# Altium PCB SPT3G_LCBoardRev5.PcbDoc (part 1 of 4)
Units mil, origin at the board's own origin, x right, y up, seen from the top; angles counter-clockwise.
Board outline 7275.33 x 1969 mil, 6 copper layers (Top Layer, Signal Layer 1, Internal Plane 1, Internal Plane 2, Signal Layer 2, Bottom Layer), stack 61.6 mil thick; 26 components, 141 nets, 668 pads, 146 vias.
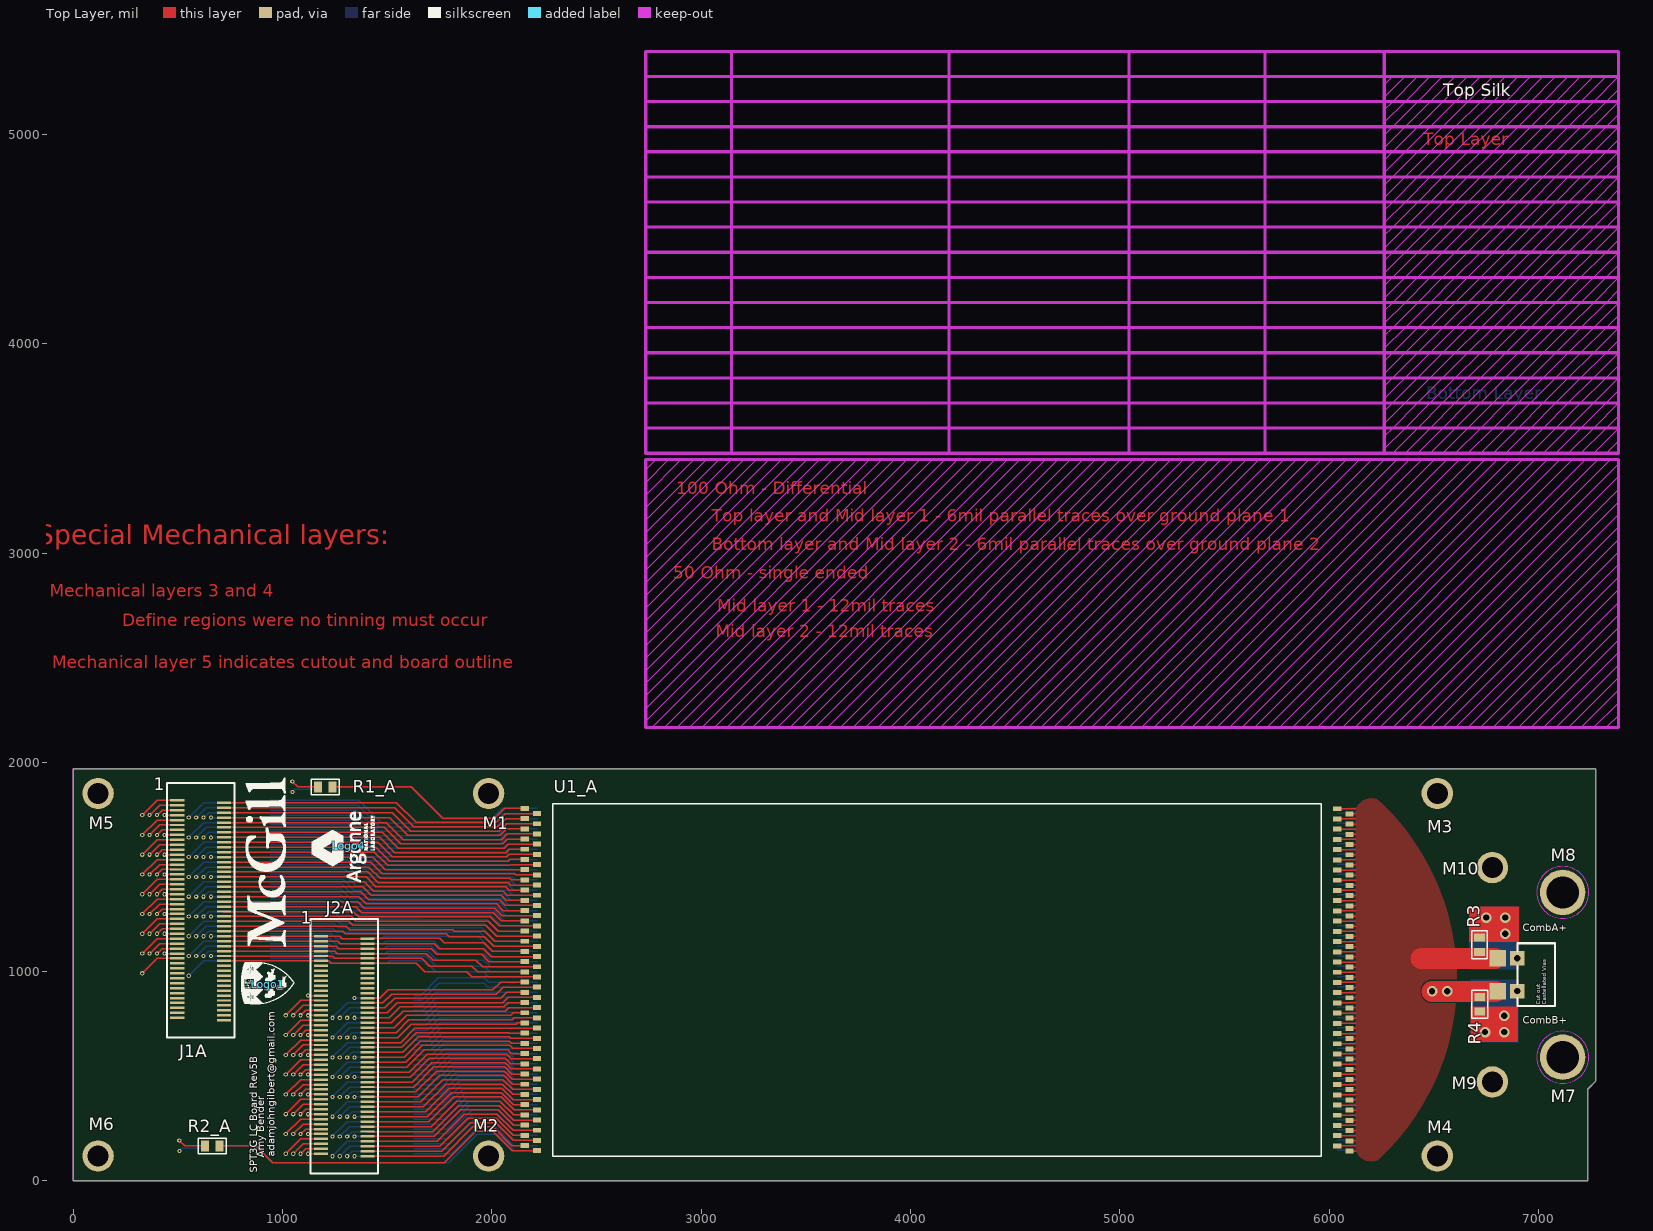
[diagram p0: Top Layer view]
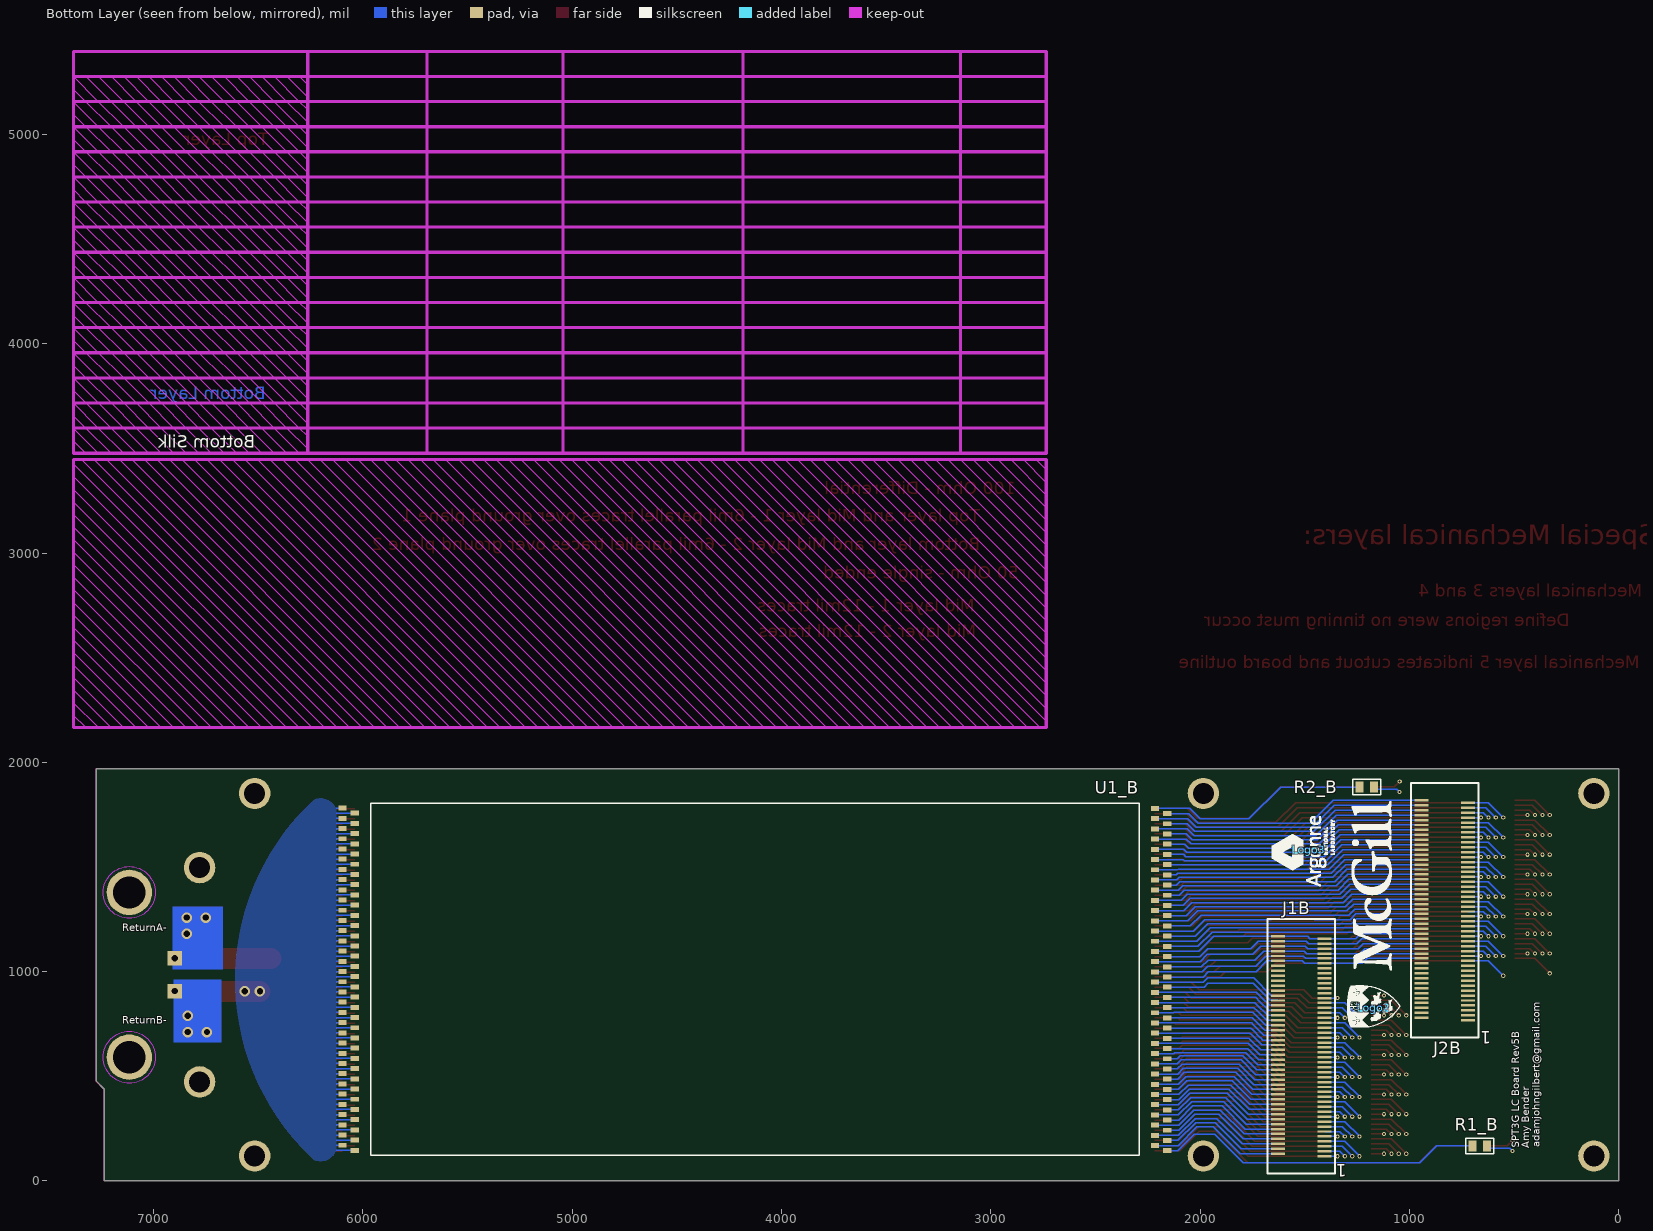
[diagram p1: Bottom Layer view, seen from below]
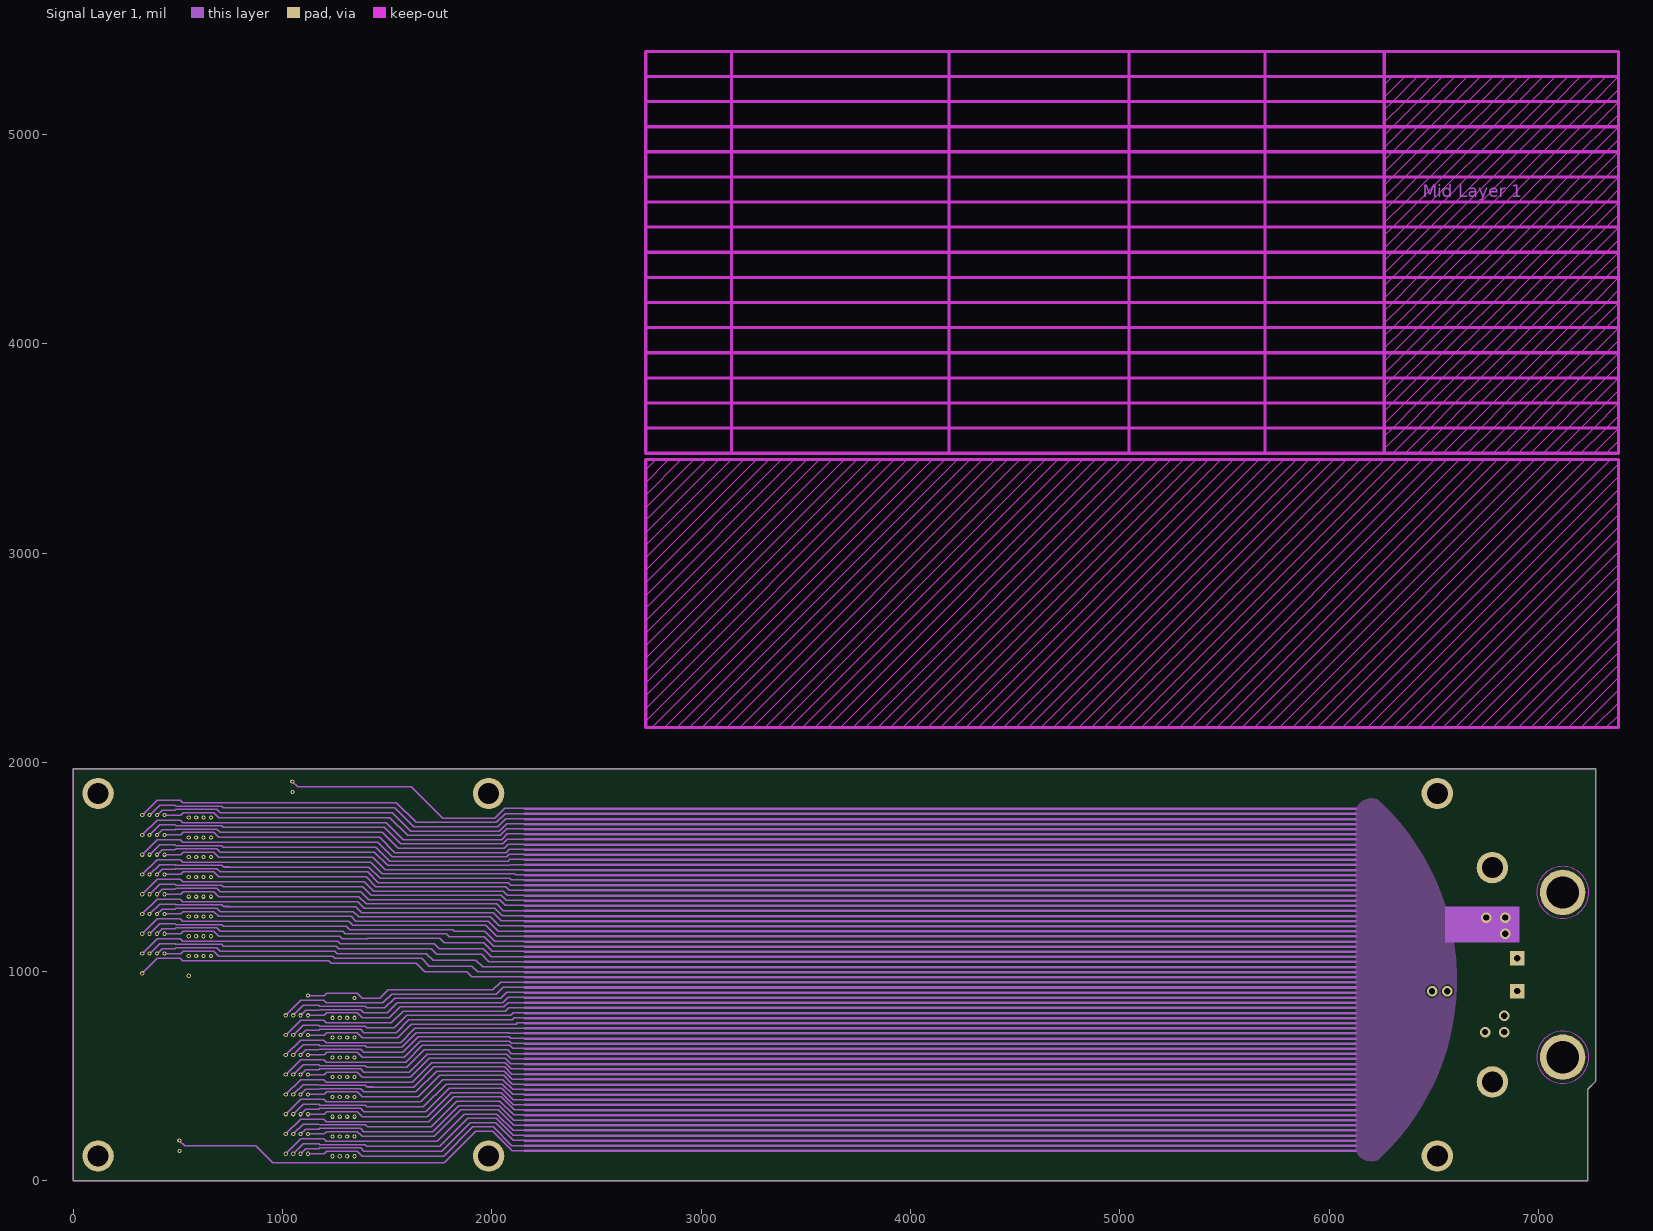
[diagram p2: Signal Layer 1]
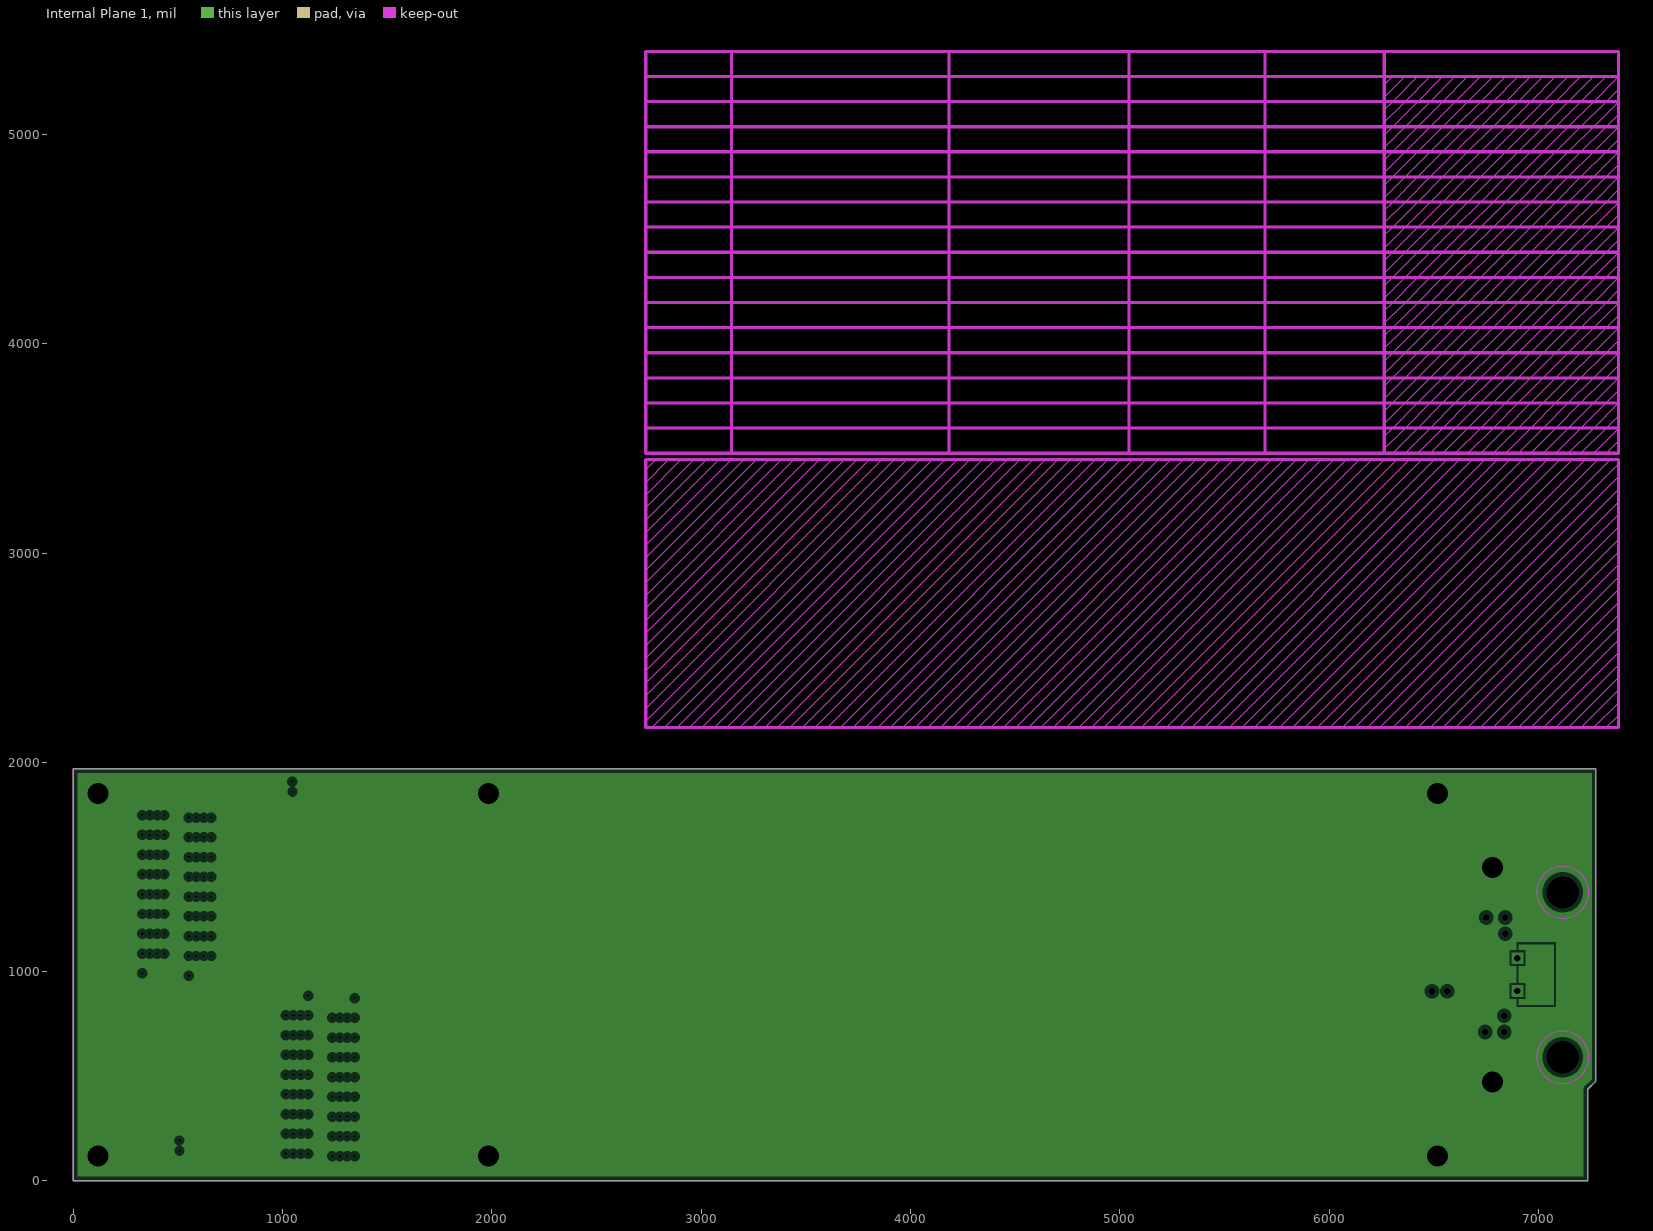
[diagram p3: Internal Plane 1, clearances drawn from the general rule]
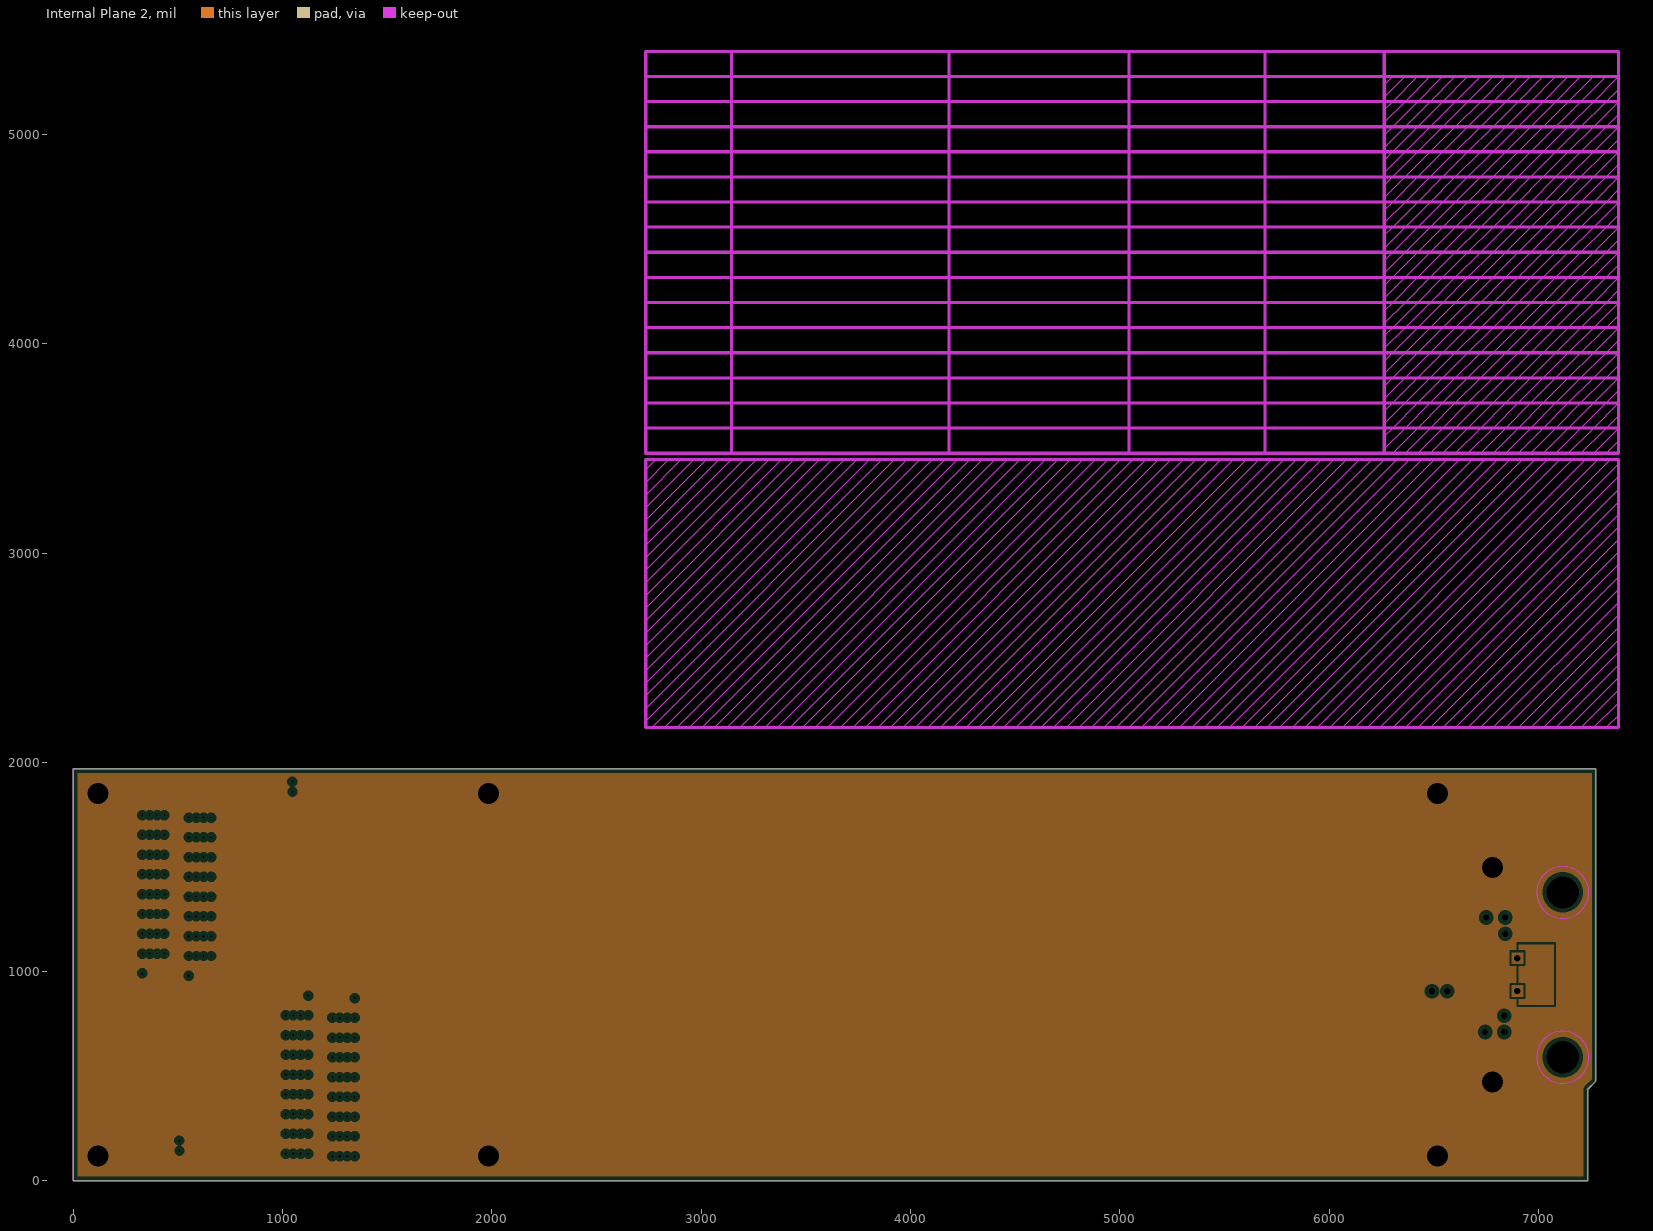
[diagram p4: Internal Plane 2, clearances drawn from the general rule]
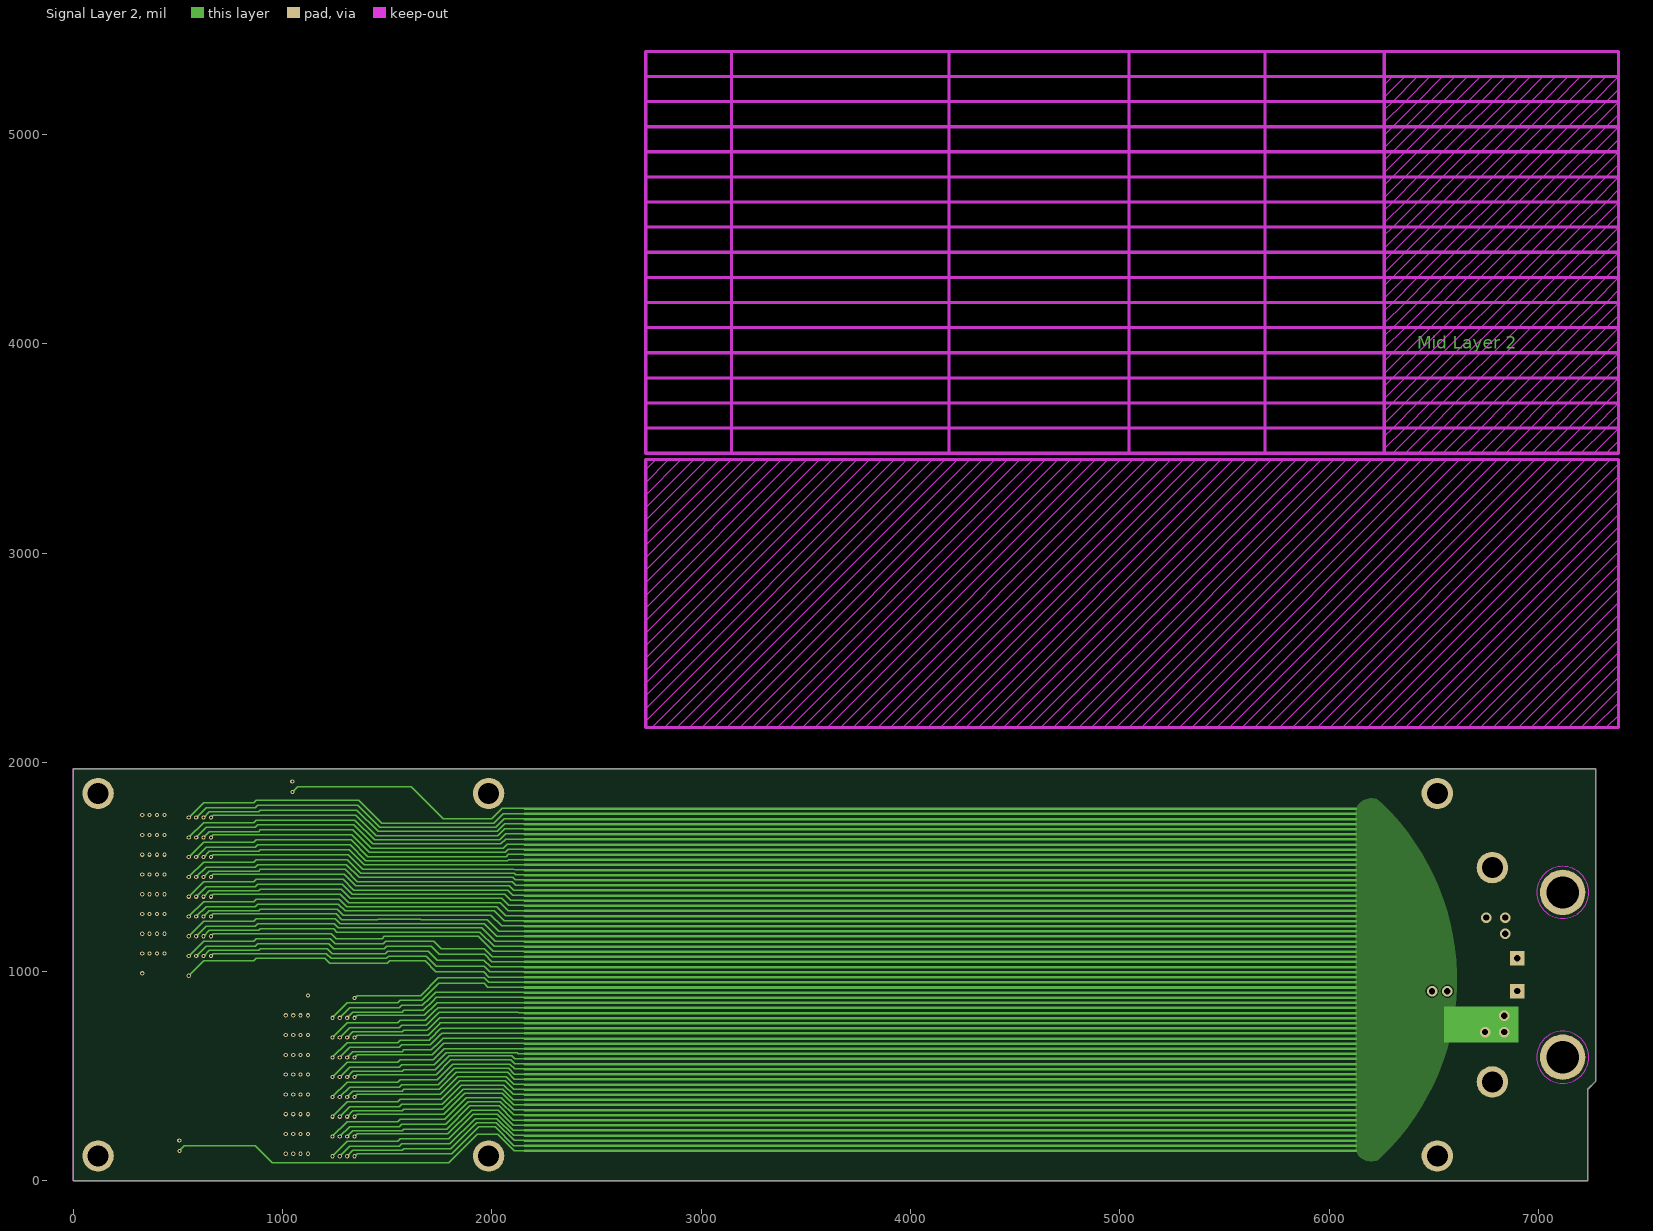
[diagram p5: Signal Layer 2]

## Layer stack, top to bottom
Top Solder: solder mask 0.4, Solder Resist, Dk 3.5
Top Layer: signal copper 1.4
Dielectric 1: core 4, FR-4, Dk 4.2
Signal Layer 1: signal copper 0.7
Dielectric 3: prepreg 9, Dk 4.2
Internal Plane 1: plane copper 0.7, net GND
Dielectric 4: core 30, Dk 4.2
Internal Plane 2: plane copper 0.7, net GND
Dielectric 5: prepreg 9, Dk 4.2
Signal Layer 2: signal copper 0.7
Dielectric 2: core 4, Dk 4.2
Bottom Layer: signal copper 1.4
Bottom Solder: solder mask 0.4, Solder Resist, Dk 3.5

## Board outline
0,0 0,1969 7275.33,1969 7275.33,477 7235.96,437.63 7235.96,0

## Design rules (kind name [scope] priority, off if disabled: settings)
Clearance [All] p1: gap=6 ignorepadtopadclearanceinfootprint=FALSE except(0: Arc-Hole Track-Hole SMDPad-Hole THPad-Hole Via-Hole Fill-Hole Poly-Hole Region-Hole Text-Hole)
ComponentClearance [All] p1 off: gap=10 collisioncheckmode=3 verticalgap=10 showdistances=FALSE
HoleSize [All] p1: absolutevalues=TRUE maxlimit=200 minlimit=1 maxpercent=80.000 minpercent=20.000
MinimumSolderMaskSliver [All] p1: minsoldermaskwidth=3
PasteMaskExpansion PasteMaskExpansion_StiplLineCon [(ObjectKind = 'Pad') And (Layer = 'Top Layer') And (AsMM(PadXSize_AllLayers) = 2) And (AsMM(PadYSize_AllLayers) = 2)] p1: expansion=-157.48
PasteMaskExpansion PasteMaskExpansion_wafer [HasFootprint('68XLC')] p2: expansion=-196.85
PasteMaskExpansion [All] p3: expansion=0
PlaneClearance [All] p1: clearance=20
PlaneConnect MountingHoleRelief [(ObjectKind = 'Pad') And (Layer = 'MultiLayer') And (AsMils(HoleDiameter) = 120)] p1: planeconnectstyle=Direct reliefexpansion=20 reliefentries=4 reliefconductorwidth=30 reliefairgap=10
PlaneConnect CastellatedHoles [(ObjectKind = 'Via') And (Layer = 'MultiLayer') And (AsMils(HoleDiameter) = 30)] p2: planeconnectstyle=Direct reliefexpansion=20 reliefentries=4 reliefconductorwidth=30 reliefairgap=10
PlaneConnect [All] p3: planeconnectstyle=Relief reliefexpansion=20 reliefentries=4 reliefconductorwidth=10 reliefairgap=10
PolygonConnect [All] p1: connectstyle=Direct reliefconductorwidth=10 reliefentries=4 polygonreliefangle="90 Angle" airgapwidth=10
RoutingVias [All] p1: holewidth=28 width=50 viastyle="Through Hole" minholewidth=28 minwidth=50 maxholewidth=28 maxwidth=50
SilkToBoardRegionClearance [All] p1 off:
SilkToSilkClearance [All] p1: silktosilkclearance=0
SilkToSolderMaskClearance [IsPad] p1: minsilkscreentomaskgap=3 clearancetoexposedcopper=TRUE
SolderMaskExpansion [All] p1: expansion=4
Width [All] p1: maxlimit=100 minlimit=3 preferedwidth=6.01 midlayer1_prefwidth=6 midlayer2_prefwidth=6 minimp=50.000000 maximp=50.000000 favimp=50.000000
21 further rules are at their usual default settings.

## Classes and differential pairs
component class TopLevelSchem: Logo1 Logo2 Logo3 Logo4 M1 M2 M3 M4 M5 M6 M7 M8 M9 M10 R3 R4
channel class LCs: A B
component class S2: J1B J2B
component class S1: J1A J2A
component class B: R1_B R2_B U1_B
component class A: R1_A R2_A U1_A

## Components (designator, comment, footprint, x,y, rotation, side; value= is the part's Value field where it differs from the comment)
J1A "ZIF Connector FH16-90S-0.3SHW(05)" LCBOARD_ZIFCON#1 529.84,1818.5 r270 top
J1B "ZIF Connector FH16-90S-0.3SHW(05)" LCBOARD_ZIFCON#2 1438.27,117.72 r90 bottom
J2A "ZIF Connector FH16-90S-0.3SHW(05)" LCBOARD_ZIFCON#1 1215.83,1168.9 r270 top
J2B "ZIF Connector FH16-90S-0.3SHW(05)" LCBOARD_ZIFCON#2 752.28,767.32 r90 bottom
Logo1 "McGillLogo1" McGillLogo1 928.57,939.47 r90 top
Logo2 "McGillLogo1" McGillLogo1 1170.76,827.92 r90 bottom
Logo3 "ArgonneLogo" ArgonneLogo 1481.45,1582.05 r90 bottom
Logo4 "ArgonneLogo" ArgonneLogo 1315.52,1601.97 r90 top
M1 "MountingHole" MOUNTINGHOLE#1 1984.28,1851 r0 top
M2 "MountingHole" MOUNTINGHOLE#1 1984.28,119 r0 top
M3 "MountingHole" MOUNTINGHOLE#2 6517.28,1851.39 r0 top
M4 "MountingHole" MOUNTINGHOLE#2 6517.28,119.39 r0 top
M5 "MountingHole" MOUNTINGHOLE#3 147.66,1759.81 r0 top
M6 "MountingHole" MOUNTINGHOLE#4 153.48,187.3 r0 top
M7 "MountingHole" MountingHole#1 7116.56,590.8 r0 top
M8 "MountingHole" MountingHole#1 7116.56,1378.2 r0 top
M9 "MountingHole" MountingHole#2 7275.33,866.53 r0 top
M10 "MountingHole" MountingHole#3 6780.33,1496.56 r0 top
R1_A "Res1206" 0805 1168.38,1882.5 r0 top (schematic designator R1)
R1_B "Res1206" 0805 628.76,167.01 r0 bottom (schematic designator R1)
R2_A "Res1206" 0805 628.32,167.27 r0 top (schematic designator R2)
R2_B "Res1206" 0805 1168.48,1881.71 r0 bottom (schematic designator R2)
R3 "50" 0805 6719,1093 r90 top
R4 "50" 0805 6720,879 r270 top
U1_A "LC68_wafer" 68XLC 2294.52,1798.97 r0 top (schematic designator U1)
U1_B "LC68_wafer" 68XLC 2294.61,124.85 r0 bottom (schematic designator U1)

## Footprints (in the part's own frame and the unit in brackets; to place one, negate y for a bottom-side part, rotate by r counter-clockwise, add the part's x,y. Pads: shape width x height; smd on the part's side, far side on the other; paste and mask are expansions set on the pad)
68XLC [mm]
  rect 1x0.6 smd: 1(-3.5,-0.49) 2(-2,-1.11) 3(-3.5,-1.73) 4(-2,-2.35) 5(-3.5,-2.97) 6(-2,-3.59) 7(-3.5,-4.21) 8(-2,-4.83) 9(-3.5,-5.45) 10(-2,-6.07) 11(-3.5,-6.69) 12(-2,-7.31) 13(-3.5,-7.93) 14(-2,-8.55) 15(-3.5,-9.17) 16(-2,-9.79) 17(-3.5,-10.41) 18(-2,-11.03) 19(-3.5,-11.65) 20(-2,-12.27) 21(-3.5,-12.89) 22(-2,-13.51) 23(-3.5,-14.13) 24(-2,-14.75) 25(-3.5,-15.37) 26(-2,-15.99) 27(-3.5,-16.61) 28(-2,-17.23) 29(-3.5,-17.85) 30(-2,-18.47) 31(-3.5,-19.09) 32(-2,-19.71) 33(-3.5,-20.33) 34(-2,-20.95) 35(-3.5,-21.57) 36(-2,-22.19) 37(-3.5,-22.81) 38(-2,-23.43) 39(-3.5,-24.05) 40(-2,-24.67) 41(-3.5,-25.29) 42(-2,-25.91) 43(-3.5,-26.53) 44(-2,-27.15) 45(-3.5,-27.77) 46(-2,-28.39) 47(-3.5,-29.01) 48(-2,-29.63) 49(-3.5,-30.25) 50(-2,-30.87) 51(-3.5,-31.49) 52(-2,-32.11) 53(-3.5,-32.73) 54(-2,-33.35) 55(-3.5,-33.97) 56(-2,-34.59) 57(-3.5,-35.21) 58(-2,-35.83) 59(-3.5,-36.45) 60(-2,-37.07) 61(-3.5,-37.69) 62(-2,-38.31) 63(-3.5,-38.93) 64(-2,-39.55) 65(-3.5,-40.17) 66(-2,-40.79) 67(-3.5,-41.41) 68(-2,-42.03) 69(96.61,-42.073) 70(95.11,-41.453) 71(96.61,-40.832) 72(95.11,-40.213) 73(96.61,-39.593) 74(95.11,-38.973) 75(96.61,-38.352) 76(95.11,-37.733) 77(96.61,-37.113) 78(95.11,-36.493) 79(96.61,-35.873) 80(95.11,-35.253) 81(96.61,-34.633) 82(95.11,-34.013) 83(96.61,-33.393) 84(95.11,-32.773) 85(96.61,-32.153) 86(95.11,-31.533) 87(96.61,-30.913) 88(95.11,-30.293) 89(96.61,-29.673) 90(95.11,-29.053) 91(96.61,-28.433) 92(95.11,-27.813) 93(96.61,-27.193) 94(95.11,-26.573) 95(96.61,-25.953) 96(95.11,-25.333) 97(96.61,-24.713) 98(95.11,-24.093) 99(96.61,-23.473) 100(95.11,-22.853) 101(96.61,-22.232) 102(95.11,-21.612) 103(96.61,-20.993) 104(95.11,-20.373) 105(96.61,-19.752) 106(95.11,-19.132) 107(96.61,-18.513) 108(95.11,-17.893) 109(96.61,-17.272) 110(95.11,-16.652) 111(96.61,-16.033) 112(95.11,-15.413) 113(96.61,-14.792) 114(95.11,-14.172) 115(96.61,-13.553) 116(95.11,-12.933) 117(96.61,-12.313) 118(95.11,-11.693) 119(96.61,-11.073) 120(95.11,-10.453) 121(96.61,-9.833) 122(95.11,-9.213) 123(96.61,-8.592) 124(95.11,-7.973) 125(96.61,-7.352) 126(95.11,-6.733) 127(96.61,-6.112) 128(95.11,-5.493) 129(96.61,-4.872) 130(95.11,-4.253) 131(96.61,-3.632) 132(95.11,-3.013) 133(96.61,-2.392) 134(95.11,-1.773) 135(96.61,-1.152) 136(95.11,-0.533)
  silkscreen extent -0.08,-42.68 93.19,0.08, body extent 0,-42.6 93.11,0, height 2
0805 [mil]
  rect 38.5x52 smd: 1(0,0) 2(70,0)
  silkscreen extent -31,-38 101,38, body extent -19,-26 89,26, height 20
ArgonneLogo [mil]
  silkscreen extent -175,-125 161,174
LCBOARD_ZIFCON#1 [mm]
  rect 0.3x1.7 smd: 1(0,-0.85) 2(0.3,4.8) 3(0.6,-0.85) 4(0.9,4.8) 5(1.2,-0.85) 6(1.5,4.8) 7(1.8,-0.85) 8(2.1,4.8) 9(2.4,-0.85) 10(2.7,4.8) 11(3,-0.85) 12(3.3,4.8) 13(3.6,-0.85) 14(3.9,4.8) 15(4.2,-0.85) 16(4.5,4.8) 17(4.8,-0.85) 18(5.1,4.8) 19(5.4,-0.85) 20(5.7,4.8) 21(6,-0.85) 22(6.3,4.8) 23(6.6,-0.85) 24(6.9,4.8) 25(7.2,-0.85) 26(7.5,4.8) 27(7.8,-0.85) 28(8.1,4.8) 29(8.4,-0.85) 30(8.7,4.8) 31(9,-0.85) 32(9.3,4.8) 33(9.6,-0.85) 34(9.9,4.8) 35(10.2,-0.85) 36(10.5,4.8) 37(10.8,-0.85) 38(11.1,4.8) 39(11.4,-0.85) 40(11.7,4.8) 41(12,-0.85) 42(12.3,4.8) 43(12.6,-0.85) 44(12.9,4.8) 45(13.2,-0.85) 46(13.5,4.8) 47(13.8,-0.85) 48(14.1,4.8) 49(14.4,-0.85) 50(14.7,4.8) 51(15,-0.85) 52(15.3,4.8) 53(15.6,-0.85) 54(15.9,4.8) 55(16.2,-0.85) 56(16.5,4.8) 57(16.8,-0.85) 58(17.1,4.8) 59(17.4,-0.85) 60(17.7,4.8) 61(18,-0.85) 62(18.3,4.8) 63(18.6,-0.85) 64(18.9,4.8) 65(19.2,-0.85) 66(19.5,4.8) 67(19.8,-0.85) 68(20.1,4.8) 69(20.4,-0.85) 70(20.7,4.8) 71(21,-0.85) 72(21.3,4.8) 73(21.6,-0.85) 74(21.9,4.8) 75(22.2,-0.85) 76(22.5,4.8) 77(22.8,-0.85) 78(23.1,4.8) 79(23.4,-0.85) 80(23.7,4.8) 81(24,-0.85) 82(24.3,4.8) 83(24.6,-0.85) 84(24.9,4.8) 85(25.2,-0.85) 86(25.5,4.8) 87(25.8,-0.85) 88(26.1,4.8) 89(26.4,-0.85) 90(26.7,4.8)
  round 0.5 on Top Overlay: 2(-2.3,-2.4)
  silkscreen extent -2.1,-2.1 28.8,6.1, body extent -2.1,-1.73 28.8,5.68, height 6.5
LCBOARD_ZIFCON#2 [mm]
  rect 0.3x1.7 smd: 1(0,-0.85) 2(0.3,4.8) 3(0.6,-0.85) 4(0.9,4.8) 5(1.2,-0.85) 6(1.5,4.8) 7(1.8,-0.85) 8(2.1,4.8) 9(2.4,-0.85) 10(2.7,4.8) 11(3,-0.85) 12(3.3,4.8) 13(3.6,-0.85) 14(3.9,4.8) 15(4.2,-0.85) 16(4.5,4.8) 17(4.8,-0.85) 18(5.1,4.8) 19(5.4,-0.85) 20(5.7,4.8) 21(6,-0.85) 22(6.3,4.8) 23(6.6,-0.85) 24(6.9,4.8) 25(7.2,-0.85) 26(7.5,4.8) 27(7.8,-0.85) 28(8.1,4.8) 29(8.4,-0.85) 30(8.7,4.8) 31(9,-0.85) 32(9.3,4.8) 33(9.6,-0.85) 34(9.9,4.8) 35(10.2,-0.85) 36(10.5,4.8) 37(10.8,-0.85) 38(11.1,4.8) 39(11.4,-0.85) 40(11.7,4.8) 41(12,-0.85) 42(12.3,4.8) 43(12.6,-0.85) 44(12.9,4.8) 45(13.2,-0.85) 46(13.5,4.8) 47(13.8,-0.85) 48(14.1,4.8) 49(14.4,-0.85) 50(14.7,4.8) 51(15,-0.85) 52(15.3,4.8) 53(15.6,-0.85) 54(15.9,4.8) 55(16.2,-0.85) 56(16.5,4.8) 57(16.8,-0.85) 58(17.1,4.8) 59(17.4,-0.85) 60(17.7,4.8) 61(18,-0.85) 62(18.3,4.8) 63(18.6,-0.85) 64(18.9,4.8) 65(19.2,-0.85) 66(19.5,4.8) 67(19.8,-0.85) 68(20.1,4.8) 69(20.4,-0.85) 70(20.7,4.8) 71(21,-0.85) 72(21.3,4.8) 73(21.6,-0.85) 74(21.9,4.8) 75(22.2,-0.85) 76(22.5,4.8) 77(22.8,-0.85) 78(23.1,4.8) 79(23.4,-0.85) 80(23.7,4.8) 81(24,-0.85) 82(24.3,4.8) 83(24.6,-0.85) 84(24.9,4.8) 85(25.2,-0.85) 86(25.5,4.8) 87(25.8,-0.85) 88(26.1,4.8) 89(26.4,-0.85) 90(26.7,4.8)
  round 0.5 on Bottom Overlay: 2(-2.3,-2.4)
  silkscreen extent -2.1,-2.1 28.8,6.1, body extent -2.1,-1.73 28.8,5.68, height 6.5
McGillLogo1 [mil] "McGillLogo"
  silkscreen extent -95,-127 986,124
MOUNTINGHOLE#1 [mil] "Mounting Hole"
  round 150 hole 100: 0(0,0)
MOUNTINGHOLE#2 [mil] "Mounting Hole"
  round 150 hole 100: 0(0,-0.39)
MOUNTINGHOLE#3 [mil] "Mounting Hole"
  round 150 hole 100: 0(-29.55,91.19)
MOUNTINGHOLE#4 [mil] "Mounting Hole"
  round 150 hole 100: 0(-35.37,-68.28)
MountingHole#1 [mil] "Mounting Hole"
  round 217 hole 154: 0(0,0)
MountingHole#2 [mil] "Mounting Hole"
  round 150 hole 100: 0(-495,-393.7)
MountingHole#3 [mil] "Mounting Hole"
  round 150 hole 100: 0(0,0)

## Part data
J1A J1B J2A J2B: library part LCboard_FH16-90S-0.3SHW(05)
Logo1 Logo2 Logo3 Logo4: library part Logo
R1_A R1_B R2_A R2_B: "Resistor"
R3 R4: library part Res1206, "Resistor"
U1_A U1_B: library part LC68Wafer, "Gold bonded integrated LC"

## Free pads (board coordinates)
  rect 78.74x78.74 smd: 0(6806.27,906.56) 0(6806.27,1064.03)
  rect 70x70 smd paste-50 mask-50: 0(6899.91,906.76) 0(6899.91,1063.92)
  rect 70x70 smd far side paste-50 mask-50: 0(6899.91,906.76) 0(6899.91,1063.92)
  rect 70x70 on Mid2: 0(6899.91,906.76) 0(6899.91,1063.92)
  rect 70x70 on Mid1: 0(6899.91,906.76) 0(6899.91,1063.92)

## Via types
v1: diameter 20, hole 10, Top Layer to Bottom Layer, 136 vias
v2: diameter 50, hole 30, Top Layer to Bottom Layer, 10 vias

## Nets (pads, with @x,y where several pads share a name; then routed paths per layer and width w, separated by ;. In a path a pad name is that pad's centre, name@x,y a point inside that pad or via, vN(x,y) a via of type N, cw(c..) or ccw(c..) an arc to the next point about the centre after c; other vN are vias at no path point)
BOLOCOMBA: pad.0@6806.27,1064.03 R3.1 U1_A.69 U1_A.70 U1_A.71 U1_A.72 U1_A.73 U1_A.74 U1_A.75 U1_A.76 U1_A.77 U1_A.78 U1_A.79 U1_A.80 U1_A.81 U1_A.82 U1_A.83 U1_A.84 U1_A.85 U1_A.86 U1_A.87 U1_A.88 U1_A.89 U1_A.90 U1_A.91 U1_A.92 U1_A.93 U1_A.94 U1_A.95 U1_A.96 U1_A.97 U1_A.98 U1_A.99 U1_A.100 U1_A.101 U1_A.102 U1_A.103 U1_A.104 U1_A.105 U1_A.106 U1_A.107 U1_A.108 U1_A.109 U1_A.110 U1_A.111 U1_A.112 U1_A.113 U1_A.114 U1_A.115 U1_A.116 U1_A.117 U1_A.118 U1_A.119 U1_A.120 U1_A.121 U1_A.122 U1_A.123 U1_A.124 U1_A.125 U1_A.126 U1_A.127 U1_A.128 U1_A.129 U1_A.130 U1_A.131 U1_A.132 U1_A.133 U1_A.134 U1_A.135 U1_A.136 | length 4427.2
  Top Layer w6: U1_A.70@6039.01,166.98 6128.42,166.98 ; U1_A.72@6039.01,215.8 6128.42,215.8 ; U1_A.74@6039.01,264.62 6128.42,264.62 ; U1_A.76@6039.01,313.44 6128.42,313.44 ; U1_A.78@6039.01,362.26 6128.42,362.26 ; U1_A.80@6039.01,411.08 6128.42,411.08 ; U1_A.82@6039.01,459.9 6128.42,459.9 ; U1_A.84@6039.01,508.72 6128.42,508.72 ; U1_A.86@6039.01,557.54 6128.42,557.54 ; U1_A.88@6039.01,606.35 6128.42,606.35 ; U1_A.90@6039.01,655.17 6128.42,655.17 ; U1_A.92@6039.01,703.99 6128.42,703.99 ; U1_A.94@6039.01,752.81 6128.42,752.81 ; U1_A.96@6039.01,801.63 6128.42,801.63 ; U1_A.98@6039.01,850.45 6128.42,850.45 ; U1_A.100@6039.01,899.27 6128.42,899.27 ; U1_A.102@6039.01,948.09 6128.42,948.09 ; U1_A.104@6039.01,996.91 6128.42,996.91 ; U1_A.106@6039.01,1045.72 6128.42,1045.72 ; U1_A.108@6039.01,1094.54 6128.42,1094.54 ; U1_A.110@6039.01,1143.36 6128.42,1143.36 ; U1_A.112@6039.01,1192.18 6128.42,1192.18 ; U1_A.114@6039.01,1241 6128.42,1241 ; U1_A.116@6039.01,1289.82 6128.42,1289.82 ; U1_A.118@6039.01,1338.64 6128.42,1338.64 ; U1_A.120@6039.01,1387.46 6128.42,1387.46 ; U1_A.122@6039.01,1436.28 6128.42,1436.28 ; U1_A.124@6039.01,1485.09 6128.42,1485.09 ; U1_A.126@6039.01,1533.91 6128.42,1533.91 ; U1_A.128@6039.01,1582.73 6128.42,1582.73 ; U1_A.130@6039.01,1631.55 6128.42,1631.55 ; U1_A.132@6039.01,1680.37 6128.42,1680.37 ; U1_A.134@6039.01,1729.19 6128.42,1729.19 ; U1_A.136@6039.01,1778.01 6128.42,1778.01 ; U1_A.69@6098.07,142.58 6128.42,142.58 ; U1_A.71@6098.07,191.39 6128.42,191.39 ; U1_A.73@6098.07,240.21 6128.42,240.21 ; U1_A.75@6098.07,289.03 6128.42,289.03 ; U1_A.77@6098.07,337.85 6128.42,337.85 ; U1_A.79@6098.07,386.67 6128.42,386.67 ; U1_A.81@6098.07,435.49 6128.42,435.49 ; U1_A.83@6098.07,484.31 6128.42,484.31 ; U1_A.85@6098.07,533.13 6128.42,533.13 ; U1_A.87@6098.07,581.95 6128.42,581.95 ; U1_A.89@6098.07,630.76 6128.42,630.76 ; U1_A.91@6098.07,679.58 6128.42,679.58 ; U1_A.93@6098.07,728.4 6128.42,728.4 ; U1_A.95@6098.07,777.22 6128.42,777.22 ; U1_A.97@6098.07,826.04 6128.42,826.04 ; U1_A.99@6098.07,874.86 6128.42,874.86 ; U1_A.101@6098.07,923.68 6128.42,923.68 ; U1_A.103@6098.07,972.5 6128.42,972.5 ; U1_A.105@6098.07,1021.32 6128.42,1021.32 ; U1_A.107@6098.07,1070.13 6128.42,1070.13 ; U1_A.109@6098.07,1118.95 6128.42,1118.95 ; U1_A.111@6098.07,1167.77 6128.42,1167.77 ; U1_A.113@6098.07,1216.59 6128.42,1216.59 ; U1_A.115@6098.07,1265.41 6128.42,1265.41 ; U1_A.117@6098.07,1314.23 6128.42,1314.23 ; U1_A.119@6098.07,1363.05 6128.42,1363.05 ; U1_A.121@6098.07,1411.87 6128.42,1411.87 ; U1_A.123@6098.07,1460.69 6128.42,1460.69 ; U1_A.125@6098.07,1509.5 6128.42,1509.5 ; U1_A.127@6098.07,1558.32 6128.42,1558.32 ; U1_A.129@6098.07,1607.14 6128.42,1607.14 ; U1_A.131@6098.07,1655.96 6128.42,1655.96 ; U1_A.133@6098.07,1704.78 6128.42,1704.78 ; U1_A.135@6098.07,1753.6 6128.42,1753.6
  Top Layer w100: 6438.48,1063.24 pad.0@6794,1063.24
BOLOCOMBB: pad.0@6806.27,906.56 R4.1 U1_B.69 U1_B.70 U1_B.71 U1_B.72 U1_B.73 U1_B.74 U1_B.75 U1_B.76 U1_B.77 U1_B.78 U1_B.79 U1_B.80 U1_B.81 U1_B.82 U1_B.83 U1_B.84 U1_B.85 U1_B.86 U1_B.87 U1_B.88 U1_B.89 U1_B.90 U1_B.91 U1_B.92 U1_B.93 U1_B.94 U1_B.95 U1_B.96 U1_B.97 U1_B.98 U1_B.99 U1_B.100 U1_B.101 U1_B.102 U1_B.103 U1_B.104 U1_B.105 U1_B.106 U1_B.107 U1_B.108 U1_B.109 U1_B.110 U1_B.111 U1_B.112 U1_B.113 U1_B.114 U1_B.115 U1_B.116 U1_B.117 U1_B.118 U1_B.119 U1_B.120 U1_B.121 U1_B.122 U1_B.123 U1_B.124 U1_B.125 U1_B.126 U1_B.127 U1_B.128 U1_B.129 U1_B.130 U1_B.131 U1_B.132 U1_B.133 U1_B.134 U1_B.135 U1_B.136 | length 4374.5
  Top Layer w100: v2(6492.11,905.76) pad.0@6795,905.76
  Bottom Layer w6: U1_B.136@6039.1,145.81 6128.51,145.81 ; U1_B.134@6039.1,194.63 6128.51,194.63 ; U1_B.132@6039.1,243.45 6128.51,243.45 ; U1_B.130@6039.1,292.27 6128.51,292.27 ; U1_B.128@6039.1,341.09 6128.51,341.09 ; U1_B.126@6039.1,389.91 6128.51,389.91 ; U1_B.124@6039.1,438.73 6128.51,438.73 ; U1_B.122@6039.1,487.55 6128.51,487.55 ; U1_B.120@6039.1,536.37 6128.51,536.37 ; U1_B.118@6039.1,585.18 6128.51,585.18 ; U1_B.116@6039.1,634 6128.51,634 ; U1_B.114@6039.1,682.82 6128.51,682.82 ; U1_B.112@6039.1,731.64 6128.51,731.64 ; U1_B.110@6039.1,780.46 6128.51,780.46 ; U1_B.108@6039.1,829.28 6128.51,829.28 ; U1_B.106@6039.1,878.1 6128.51,878.1 ; U1_B.104@6039.1,926.92 6128.51,926.92 ; U1_B.102@6039.1,975.74 6128.51,975.74 ; U1_B.100@6039.1,1024.55 6128.51,1024.55 ; U1_B.98@6039.1,1073.37 6128.51,1073.37 ; U1_B.96@6039.1,1122.19 6128.51,1122.19 ; U1_B.94@6039.1,1171.01 6128.51,1171.01 ; U1_B.92@6039.1,1219.83 6128.51,1219.83 ; U1_B.90@6039.1,1268.65 6128.51,1268.65 ; U1_B.88@6039.1,1317.47 6128.51,1317.47 ; U1_B.86@6039.1,1366.29 6128.51,1366.29 ; U1_B.84@6039.1,1415.11 6128.51,1415.11 ; U1_B.82@6039.1,1463.92 6128.51,1463.92 ; U1_B.80@6039.1,1512.74 6128.51,1512.74 ; U1_B.78@6039.1,1561.56 6128.51,1561.56 ; U1_B.76@6039.1,1610.38 6128.51,1610.38 ; U1_B.74@6039.1,1659.2 6128.51,1659.2 ; U1_B.72@6039.1,1708.02 6128.51,1708.02 ; U1_B.70@6039.1,1756.84 6128.51,1756.84 ; U1_B.135@6098.16,170.22 6128.51,170.22 ; U1_B.133@6098.16,219.04 6128.51,219.04 ; U1_B.131@6098.16,267.86 6128.51,267.86 ; U1_B.129@6098.16,316.68 6128.51,316.68 ; U1_B.127@6098.16,365.5 6128.51,365.5 ; U1_B.125@6098.16,414.32 6128.51,414.32 ; U1_B.123@6098.16,463.14 6128.51,463.14 ; U1_B.121@6098.16,511.96 6128.51,511.96 ; U1_B.119@6098.16,560.77 6128.51,560.78 ; U1_B.117@6098.16,609.59 6128.51,609.59 ; U1_B.115@6098.16,658.41 6128.51,658.41 ; U1_B.113@6098.16,707.23 6128.51,707.23 ; U1_B.111@6098.16,756.05 6128.51,756.05 ; U1_B.109@6098.16,804.87 6128.51,804.87 ; U1_B.107@6098.16,853.69 6128.51,853.69 ; U1_B.105@6098.16,902.51 6128.51,902.51 ; U1_B.103@6098.16,951.33 6128.51,951.33 ; U1_B.101@6098.16,1000.14 6128.51,1000.14 ; U1_B.99@6098.16,1048.96 6128.51,1048.96 ; U1_B.97@6098.16,1097.78 6128.51,1097.78 ; U1_B.95@6098.16,1146.6 6128.51,1146.6 ; U1_B.93@6098.16,1195.42 6128.51,1195.42 ; U1_B.91@6098.16,1244.24 6128.51,1244.24 ; U1_B.89@6098.16,1293.06 6128.51,1293.06 ; U1_B.87@6098.16,1341.88 6128.51,1341.88 ; U1_B.85@6098.16,1390.7 6128.51,1390.7 ; U1_B.83@6098.16,1439.52 6128.51,1439.52 ; U1_B.81@6098.16,1488.33 6128.51,1488.33 ; U1_B.79@6098.16,1537.15 6128.51,1537.15 ; U1_B.77@6098.16,1585.97 6128.51,1585.97 ; U1_B.75@6098.16,1634.79 6128.51,1634.79 ; U1_B.73@6098.16,1683.61 6128.51,1683.61 ; U1_B.71@6098.16,1732.43 6128.51,1732.43 ; U1_B.69@6098.16,1781.25 6128.51,1781.25
  other v2: 6565.34,905.76